# Altium PCB Main.PcbDoc
Units mm, origin at the board's own origin, x right, y up, seen from the top; angles counter-clockwise.
Board outline 150 x 120 mm, 2 copper layers (Top Layer, Bottom Layer); 19 components, 34 nets, 130 pads, 0 vias.
Unrouted connection lines stored in the file: 1.
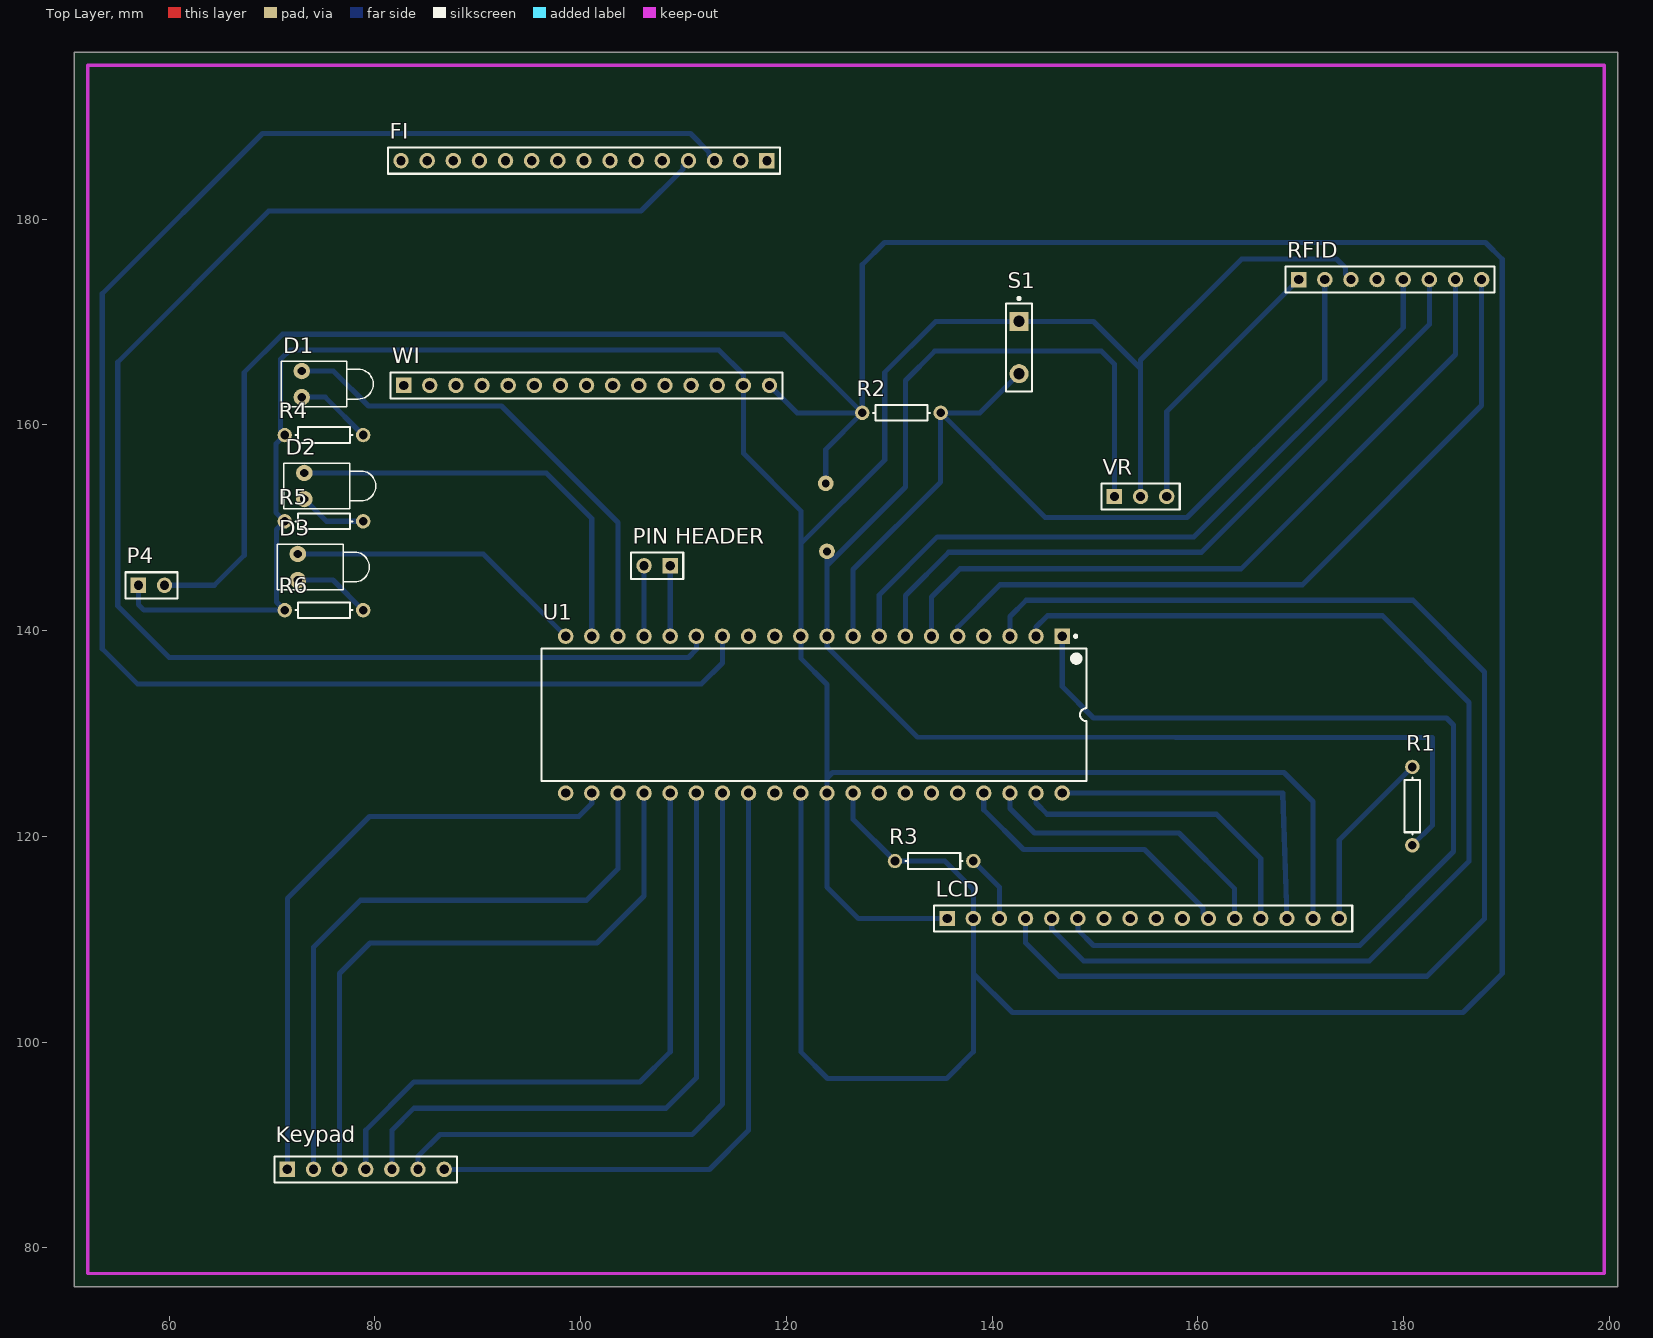
[diagram p0: Top Layer view]
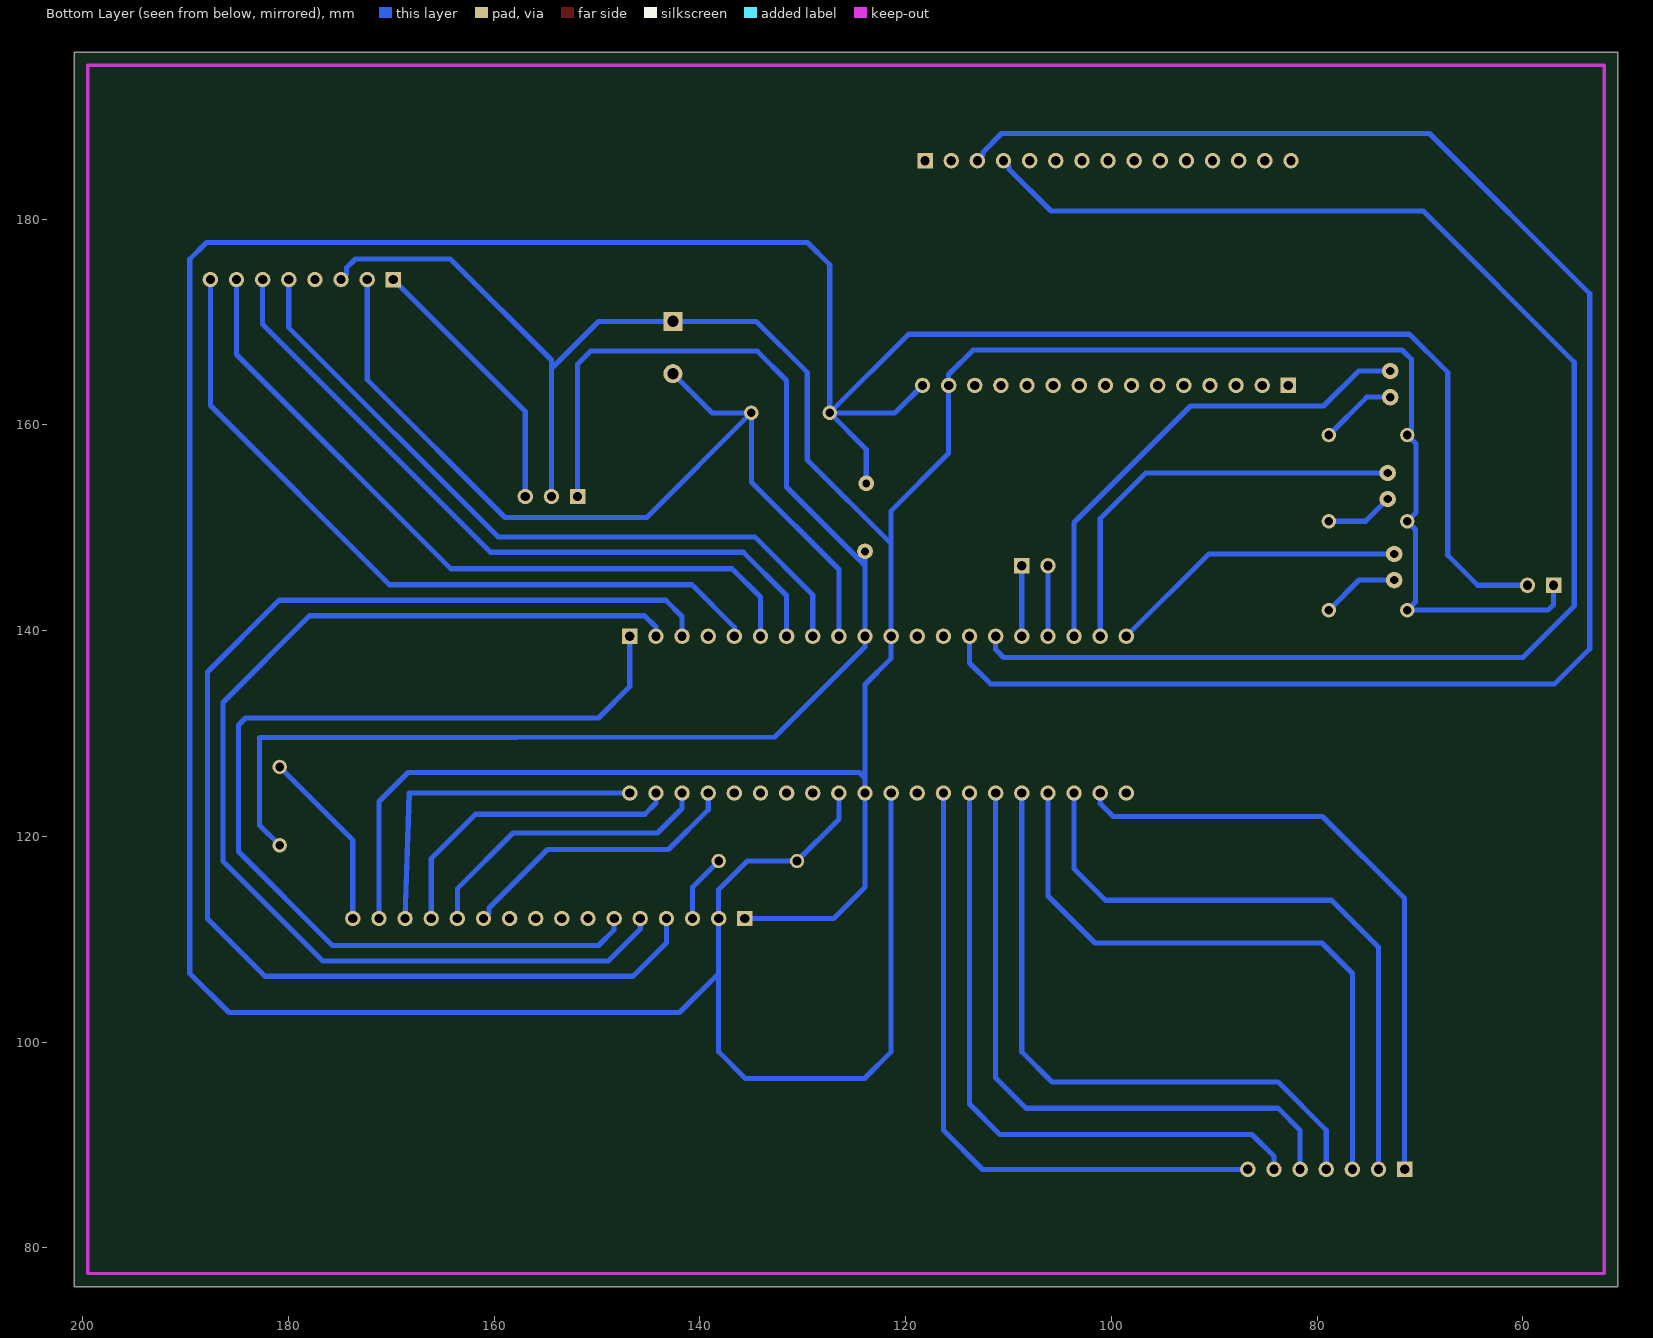
[diagram p1: Bottom Layer view, seen from below]

## Layer stack, top to bottom
Top Solder: solder mask 0.0102, Solder Resist, Dk 3.5
Top Layer: signal copper 0.0356
Dielectric 1: dielectric 0.32, FR-4, Dk 4.8
Bottom Layer: signal copper 0.0356
Bottom Solder: solder mask 0.0102, Solder Resist, Dk 3.5

## Board outline
50.8,76.2 200.8,76.2 200.8,196.2 50.8,196.2

## Design rules (kind name [scope] priority, off if disabled: settings)
Clearance [All] p1: gap=1
PolygonConnect [All] p1: connectstyle=Relief reliefconductorwidth=0.254 reliefentries=4 polygonreliefangle="90 Angle" airgapwidth=0.254
RoomDefinition Pcb [InComponentClass('Pcb')] p1: confinementstyle=ConfineIn formatcopy=TRUE lockcomponents=FALSE outline 201.93,77.724 329.819,77.724 329.819,133.858 201.93,133.858
RoutingVias [All] p1: holewidth=1 width=1.5 viastyle="Through Hole" minholewidth=0.711 minwidth=1.27 maxholewidth=0.711 maxwidth=1.27
SolderMaskExpansion [All] p1: expansion=0.102
Width [All] p1: maxlimit=1 minlimit=0.5 preferedwidth=0.5 minimp=50.000000 maximp=50.000000 favimp=50.000000
30 further rules are at their usual default settings.

## Components (designator, comment, footprint, x,y, rotation, side; value= is the part's Value field where it differs from the comment)
D1 "LED1" LED-1 72.898,163.957 r0 top
D2 "LED1" LED-1 73.152,154.051 r0 top
D3 "LED1" LED-1 72.517,146.177 r0 top
FI "wifi module" HDR1X15 118.11,185.674 r180 top
Keypad "Keypad" HDR1X7 71.501,87.63 r0 top
LCD "2*16 lcd" HDR1X16 135.636,112.014 r0 top
P4 "power" HDR1X2 57.023,144.399 r0 top
"PIN HEADER" "Header 2" HDR1X2 108.712,146.304 r180 top
R1 "Res1" AXIAL-0.3 180.848,122.936 r90 top
R2 "Res1" AXIAL-0.3 131.191,161.163 r180 top
R3 "Res1" AXIAL-0.3 134.366,117.602 r0 top
R4 "Res1" AXIAL-0.3 75.057,159.004 r0 top
R5 "Res1" AXIAL-0.3 75.057,150.622 r0 top
R6 "Res1" AXIAL-0.3 75.057,141.986 r0 top
RFID "RFID" HDR1X8 169.799,174.117 r0 top
S1 "SW-PB" SPST-2 142.621,167.513 r270 top
U1 "ATmega16A-PU" 40P6 122.682,131.826 r270 top
VR "Header 3" HDR1X3 151.892,153.035 r0 top (schematic designator P1)
WI "wifi module" HDR1X15 82.804,163.83 r0 top

## Footprints (in the part's own frame and the unit in brackets; to place one, negate y for a bottom-side part, rotate by r counter-clockwise, add the part's x,y. Pads: shape width x height; smd on the part's side, far side on the other; paste and mask are expansions set on the pad)
40P6 [mm] "DIP, 40-Leads, Row Spacing 15.24mm, Pitch 2.54mm, Body 52.2x13.95mm"
  rect 1.5x1.5 hole 0.9: 1(-7.62,24.13)
  round 1.5 hole 0.9: 2(-7.62,21.59) 3(-7.62,19.05) 4(-7.62,16.51) 5(-7.62,13.97) 6(-7.62,11.43) 7(-7.62,8.89) 8(-7.62,6.35) 9(-7.62,3.81) 10(-7.62,1.27) 11(-7.62,-1.27) 12(-7.62,-3.81) 13(-7.62,-6.35) 14(-7.62,-8.89) 15(-7.62,-11.43) 16(-7.62,-13.97) 17(-7.62,-16.51) 18(-7.62,-19.05) 19(-7.62,-21.59) 20(-7.62,-24.13) 21(7.62,-24.13) 22(7.62,-21.59) 23(7.62,-19.05) 24(7.62,-16.51) 25(7.62,-13.97) 26(7.62,-11.43) 27(7.62,-8.89) 28(7.62,-6.35) 29(7.62,-3.81) 30(7.62,-1.27) 31(7.62,1.27) 32(7.62,3.81) 33(7.62,6.35) 34(7.62,8.89) 35(7.62,11.43) 36(7.62,13.97) 37(7.62,16.51) 38(7.62,19.05) 39(7.62,21.59) 40(7.62,24.13)
  silkscreen extent -7.74,-26.5 6.45,26.5, body extent -7.05,-26.47 7.05,26.47, height 4.83
AXIAL-0.3 [mm] "Axial Device, Thru-Hole; 2 Leads; 0.3 in Pin Spacing"
  round 1.4 hole 0.85: 1(-3.81,0) 2(3.81,0)
  silkscreen extent -2.77,-0.76 2.77,0.76
HDR1X2 [mm] "Connector; Header; 2 Position"
  rect 1.5x1.5 hole 0.9: 1(0,0)
  round 1.5 hole 0.9: 2(2.54,0)
  silkscreen extent -1.27,-1.27 3.81,1.27
HDR1X3 [mm] "Connector; Header; 3 Position"
  rect 1.5x1.5 hole 0.9: 1(0,0)
  round 1.5 hole 0.9: 2(2.54,0) 3(5.08,0)
  silkscreen extent -1.27,-1.27 6.35,1.27
HDR1X7 [mm] "Connector; Header; 7 Position"
  rect 1.5x1.5 hole 0.9: 1(0,0)
  round 1.5 hole 0.9: 2(2.54,0) 3(5.08,0) 4(7.62,0) 5(10.16,0) 6(12.7,0) 7(15.24,0)
  silkscreen extent -1.27,-1.27 16.51,1.27
HDR1X8 [mm] "Connector; Header; 8 Position"
  rect 1.5x1.5 hole 0.9: 1(0,0)
  round 1.5 hole 0.9: 2(2.54,0) 3(5.08,0) 4(7.62,0) 5(10.16,0) 6(12.7,0) 7(15.24,0) 8(17.78,0)
  silkscreen extent -1.27,-1.27 19.05,1.27
HDR1X15 [mm] "Connector; Header; 15 Position"
  rect 1.5x1.5 hole 0.9: 1(0,0)
  round 1.5 hole 0.9: 2(2.54,0) 3(5.08,0) 4(7.62,0) 5(10.16,0) 6(12.7,0) 7(15.24,0) 8(17.78,0) 9(20.32,0) 10(22.86,0) 11(25.4,0) 12(27.94,0) 13(30.48,0) 14(33.02,0) 15(35.56,0)
  silkscreen extent -1.27,-1.27 36.83,1.27
HDR1X16 [mm] "Connector; Header; 16 Position"
  rect 1.5x1.5 hole 0.9: 1(0,0)
  round 1.5 hole 0.9: 2(2.54,0) 3(5.08,0) 4(7.62,0) 5(10.16,0) 6(12.7,0) 7(15.24,0) 8(17.78,0) 9(20.32,0) 10(22.86,0) 11(25.4,0) 12(27.94,0) 13(30.48,0) 14(33.02,0) 15(35.56,0) 16(38.1,0)
  silkscreen extent -1.27,-1.27 39.37,1.27
LED-1 [mm] "LED; 2 Leads"
  round 1.6 hole 0.8: 1(0,1.27) 2(0,-1.27)
  silkscreen extent -2,-2.2 6.95,2.2
SPST-2 [mm] "Switch; 2 Leads"
  rect 1.85x1.85 hole 1.1: 1(-2.54,0)
  round 1.85 hole 1.1: 2(2.54,0)
  silkscreen extent -4.89,-1.27 4.28,1.27

## Part data
D1 D2 D3: "Typical RED GaAs LED"
FI WI: library part "Header 15", "Header, 15-Pin"
Keypad: library part "Header 7", "Header, 7-Pin"
LCD: library part "Header 16", "Header, 16-Pin"
P4: library part "Header 2", "Header, 2-Pin"
"PIN HEADER": "Header, 2-Pin"
R1 R2 R3 R4 R5 R6: "Resistor"
RFID: library part "Header 8", "Header, 8-Pin"
S1: "Switch"
U1: "8-bit AVR Microcontroller, 16KB Flash, 512 Bytes EEPROM, 1KB SRAM, 40-pin PDIP, Industrial Grade (-40°C to 85°C)"
VR: "Header, 3-Pin"

## Free pads (board coordinates)
  round 1.524 hole 0.762: 0(123.825,154.305) 1(123.952,147.701)

## Nets (pads, with @x,y where several pads share a name; then routed paths per layer and width w, separated by ;. In a path a pad name is that pad's centre, name@x,y a point inside that pad or via, vN(x,y) a via of type N, cw(c..) or ccw(c..) an arc to the next point about the centre after c; other vN are vias at no path point)
GND: LCD.1 LCD.15 P4.1 R4.1 R5.1 R6.1 RFID.3 S1.1 U1.11 U1.31 VR.2 WI.14 | length 302.6
  Bottom Layer w0.5: P4.1 57.023,142.519 57.556,141.986 R6.1 70.46,142.773 70.46,149.835 R5.1 70.409,151.46 70.409,158.166 R4.1 70.841,159.41 70.841,166.37 71.755,167.284 113.436,167.284 115.824,164.897 WI.14 115.824,157.226 121.412,151.638 121.412,148.438 ; LCD.1 127,112.014 123.952,115.062 U1.31 123.952,125.679 ; VR.2 154.432,165.481 ; LCD.15 171.196,123.393 168.377,126.213 124.485,126.213 123.952,125.679 ; RFID.3 174.346,174.65 174.346,175.26 173.482,176.124 164.262,176.124 154.432,166.294 154.432,165.481 ; 121.412,148.438 U1.11 121.412,137.312 123.952,134.772 123.952,125.679 ; 121.412,148.438 129.565,156.591 129.565,165.1 134.518,170.053 S1.1 149.86,170.053 154.432,165.481
NetD1_1: D1.1 U1.18 | length 47.9
  Bottom Layer w0.5: D1.1 75.971,165.227 79.375,161.823 92.304,161.823 103.632,150.495 U1.18
NetD1_2: D1.2 R4.2 | length 7.5
  Bottom Layer w0.5: D1.2 75.184,162.687 R4.2
NetD2_1: D2.1 U1.19 | length 41.2
  Bottom Layer w0.5: D2.1 96.672,155.321 101.092,150.901 U1.19
NetD2_2: D2.2 R5.2 | length 6.6
  Bottom Layer w0.5: D2.2 75.311,150.622 R5.2
NetD3_1: D3.1 U1.20 | length 29.3
  Bottom Layer w0.5: D3.1 90.551,147.447 U1.20
NetD3_2: D3.2 R6.2 | length 7.6
  Bottom Layer w0.5: D3.2 75.946,144.907 R6.2
NetFI_3: FI.3 U1.14 | length 166.9
  Bottom Layer w0.5: FI.3 112.49,186.214 112.49,186.502 110.677,188.316 69.087,188.316 53.508,172.737 53.508,138.236 56.921,134.823 111.76,134.823 113.792,136.855 U1.14
NetFI_4: FI.4 U1.15 | length 146.6
  Bottom Layer w0.5: 109.95,185.134 109.95,184.846 105.876,180.772 69.698,180.772 55.016,166.091 55.016,142.392 60.02,137.389 110.49,137.389 111.252,138.151 U1.15
NetKeypad_1: Keypad.1 U1.22 | length 60.8
  Bottom Layer w0.5: Keypad.1 71.501,113.949 79.472,121.92 99.822,121.92 101.092,123.19 U1.22
NetKeypad_2: Keypad.2 U1.23 | length 61.7
  Bottom Layer w0.5: Keypad.2 74.041,109.22 78.613,113.792 100.584,113.792 103.632,116.84 U1.23
NetKeypad_3: Keypad.3 U1.24 | length 61.8
  Bottom Layer w0.5: Keypad.3 76.581,106.68 79.527,109.626 101.6,109.626 106.172,114.198 U1.24
NetKeypad_4: Keypad.4 U1.25 | length 61.7
  Bottom Layer w0.5: Keypad.4 79.121,91.44 83.795,96.114 105.766,96.114 108.712,99.06 U1.25
NetKeypad_5: Keypad.5 U1.26 | length 63.2
  Bottom Layer w0.5: Keypad.5 81.661,91.44 83.795,93.574 108.306,93.574 111.252,96.52 U1.26
NetKeypad_6: Keypad.6 U1.27 | length 63.2
  Bottom Layer w0.5: Keypad.6 84.201,88.9 86.335,91.034 110.846,91.034 113.792,93.98 U1.27
NetKeypad_7: Keypad.7 U1.28 | length 63.9
  Bottom Layer w0.5: Keypad.7 112.522,87.63 116.332,91.44 U1.28
NetLCD_3: LCD.3 R3.2 | length 6.6
  Bottom Layer w0.5: R3.2 140.716,115.062 LCD.3
NetLCD_4: LCD.4 U1.3 | length 126.2
  Bottom Layer w0.5: U1.3 141.732,141.366 143.312,142.946 180.9,142.946 187.861,135.985 187.861,111.988 182.271,106.398 146.51,106.398 143.256,109.652 LCD.4
NetLCD_5: LCD.5 U1.2 | length 109.2
  Bottom Layer w0.5: U1.2 144.272,140.335 145.383,141.446 177.934,141.446 186.361,133.018 186.361,117.578 176.681,107.898 148.896,107.898 145.796,110.998 LCD.5
NetLCD_6: LCD.6 U1.1 | length 98.8
  Bottom Layer w0.5: U1.1 146.812,134.557 149.86,131.509 184.162,131.509 184.861,130.81 184.861,118.516 175.743,109.398 149.86,109.398 148.336,110.922 LCD.6
NetLCD_11: LCD.11 U1.37 | length 28.1
  Bottom Layer w0.5: U1.37 139.192,122.58 143.046,118.727 154.806,118.727 160.503,113.03 160.503,112.547 LCD.11
NetLCD_12: LCD.12 U1.38 | length 29.5
  Bottom Layer w0.5: U1.38 141.732,122.707 144.12,120.32 158.166,120.32 163.576,114.91 LCD.12
NetLCD_13: LCD.13 U1.39 | length 30.9
  Bottom Layer w0.5: U1.39 144.272,123.241 145.364,122.149 161.823,122.149 166.116,117.856 LCD.13
NetLCD_14: LCD.14 U1.40 | length 33.6
  Bottom Layer w0.5: U1.40 168.25,124.206 LCD.14
NetLCD_16: LCD.16 R1.2 | length 17.7
  Bottom Layer w0.5: LCD.16 173.736,119.634 R1.2
"NetPIN HEADER_1": "PIN HEADER.1" U1.16 | length 6.9
  Bottom Layer w0.5: U1.16 108.712,146.304
"NetPIN HEADER_2": "PIN HEADER.2" U1.17 | length 6.9
  Bottom Layer w0.5: U1.17 106.172,146.304
NetR2_1: R2.1 RFID.2 S1.2 U1.9 | length 91.3
  Bottom Layer w0.5: U1.9 126.492,145.931 135.001,154.44 R2.1 ; S1.2 138.811,161.163 R2.1 ; RFID.2 172.339,164.389 158.953,151.003 145.161,151.003 R2.1
NetRFID_1: RFID.1 VR.3 | length 26.4
  Bottom Layer w0.5: VR.3 156.972,161.29 RFID.1
NetRFID_5: RFID.5 U1.8 | length 70.4
  Bottom Layer w0.5: U1.8 129.032,143.466 134.679,149.113 159.63,149.113 179.959,169.442 RFID.5
NetRFID_6: RFID.6 U1.7 | length 70.2
  Bottom Layer w0.5: U1.7 131.572,143.397 135.788,147.613 160.361,147.613 182.499,169.751 RFID.6
NetRFID_7: RFID.7 U1.6 | length 71.8
  Bottom Layer w0.5: U1.6 134.112,143.256 136.872,146.016 164.208,146.016 185.039,166.847 RFID.7
NetRFID_8: RFID.8 U1.5 | length 73
  Bottom Layer w0.5: U1.5 136.652,140.333 140.772,144.453 170.157,144.453 187.579,161.874 RFID.8
VCC: LCD.2 P4.2 pad.0 pad.1 R1.1 R2.2 R3.1 U1.10 U1.30 U1.32 VR.1 WI.15 | length 528.1
  Bottom Layer w0.5: P4.2 64.389,144.399 67.31,147.32 67.31,165.1 71.018,168.808 119.736,168.808 R2.2 ; WI.15 121.031,161.163 R2.2 ; U1.30 121.412,99.06 124.003,96.469 135.585,96.469 138.176,99.06 138.176,106.68 ; pad.0 123.825,157.607 R2.2 ; pad.1 123.952,146.329 ; U1.32 126.492,121.666 R3.1 135.407,117.602 138.176,114.833 LCD.2 138.176,106.68 ; VR.1 151.892,165.887 150.622,167.157 134.417,167.157 131.572,164.313 131.572,153.949 123.952,146.329 ; R1.1 182.804,121.082 182.804,129.584 132.74,129.642 123.952,138.43 U1.10 123.952,146.329 ; R2.2 127.381,175.565 129.54,177.724 187.96,177.724 189.586,176.098 189.586,106.68 185.776,102.87 141.986,102.87 138.176,106.68
pads on no net: FI.1 FI.2 FI.5 FI.6 FI.7 FI.8 FI.9 FI.10 FI.11 FI.12 FI.13 FI.14 FI.15 LCD.7 LCD.8 LCD.9 LCD.10 RFID.4 U1.4 U1.12 U1.13 U1.21 U1.29 U1.33 U1.34 U1.35 U1.36 WI.1 WI.2 WI.3 WI.4 WI.5 WI.6 WI.7 WI.8 WI.9 WI.10 WI.11 WI.12 WI.13

## Keep-outs
Keep-Out Layer:
  lines w0.3: 52.1,77.5 199.5,77.5 199.5,194.945 52.1,194.945 52.1,77.5

## Silkscreen, mask and mechanical layers (free items; w line width, h text height)
Drill Drawing:
  text ".LEGEND" at 205.88,81.28 h1.52
  text "Drill Drawing." at 205.88,78.74 h1.52

## Dimensions
52.1,77.5 to 199.5,77.5 on Mechanical 1
52.1,77.5 to 52.1,194.945 on Mechanical 1